# Altium PCB digital_power.PcbDoc (part 2 of 2)
Units mil, origin at the board's own origin, x right, y up, seen from the top; angles counter-clockwise.
Board outline 2700 x 2100 mil, 4 copper layers (L1, L2, L3, L4), stack 13.956 mil thick; 99 components, 71 nets, 287 pads, 79 vias.
Unrouted connection lines stored in the file: 196.
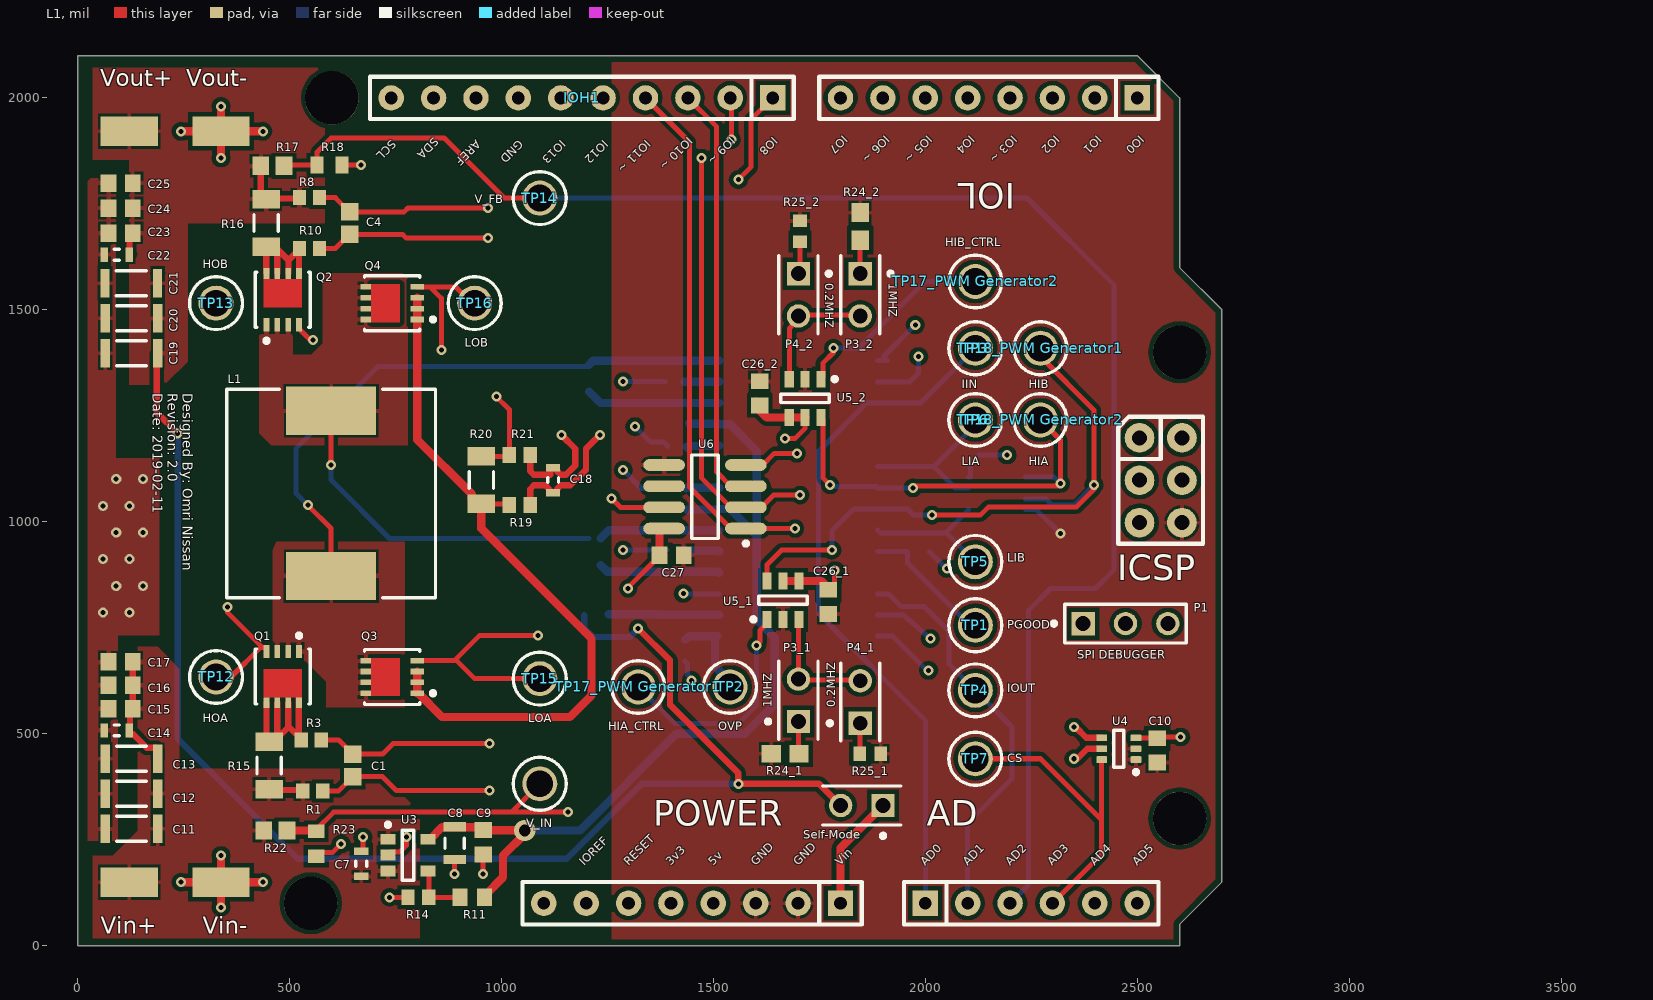
[diagram p0: L1 view]

## Via types
v1: diameter 23.62, hole 11.81, L1 to L4, tented both sides, 78 vias
v2: diameter 50, hole 28, L1 to L4, tented both sides, 1 vias

## Nets (pads, with @x,y where several pads share a name; then routed paths per layer and width w, separated by ;. In a path a pad name is that pad's centre, name@x,y a point inside that pad or via, vN(x,y) a via of type N, cw(c..) or ccw(c..) an arc to the next point about the centre after c; other vN are vias at no path point) (continued)
NetAD_4: (continued)
  L1 w11.81: TP7.1 2271.65,440.94 2416.34,296.26 ; AD.4 2416.34,216.34 2416.34,296.26 ; U4.6 2416.34,296.26
NetAD_5: AD.5 R22.1 R23.2 V_IN.1 | length 2109.8
  L1 w11.81: R23.2@564.96,271.65 564.96,275.59 604.33,314.96 1023.62,314.96 ; V_IN.1 1023.62,314.96 ; v1(1157.48,314.96) 1023.62,314.96
  L1 w19.68: R22.1 R23.2@564.96,271.65
  L2 w11.81: v1(1157.48,314.96) 1618.11,314.96 1744.09,188.98 2311.02,188.98 AD.5
NetAD_6: AD.6
NetC2_1: C2.1 U1.26 | length 318.3
  L4 w19.68: C2.1 1233.66,1280.12 U1.26
NetC2_2: C2.2 L1.1 Q1.1 Q1.2 Q1.3 Q3.5 Q3.6 Q3.7 Q3.8 U1.28 | length 1421.1
  L1 w11.81: v1(543.31,1039.37) 598.43,984.25 L1.1
  L4 w11.81: v1(543.31,1039.37) 515.75,1066.93 515.75,1173.23 709.25,1366.73 1206.69,1366.73 C2.2
  L4 w19.68: C2.2 1216.73,1380.12 U1.28
NetC3_1: C3.1 U1.18 | length 286.8
  L4 w19.68: C3.1@1234.25,897.64 1249.8,882.09 1511.81,882.09 U1.18
NetC3_2: C3.2 L1.2 Q2.1 Q2.2 Q2.3 Q4.5 Q4.6 Q4.7 Q4.8 U1.20 | length 1122.9
  L1 w11.81: v1(598.43,1133.86) 598.43,1246.06 606.3,1253.94 L1.2
  L4 w11.81: v1(598.43,1133.86) 598.43,1098.43 736.22,960.63 C3.2
  L4 w19.68: C3.2@1234.25,960.63 1253.74,980.12 U1.20
NetICSP_1: ICSP.1
NetICSP_3: ICSP.3
NetICSP_4: ICSP.4
NetIOH1_3: IOH1.3 U6.3 | length 993.4
  L1 w11.81: IOH1.3 1507.87,1932.13 1507.87,1117.52 1541.34,1084.05 U6.3
NetIOH1_8: IOH1.8
NetIOH1_9: IOH1.9
NetIOH1_10: IOH1.10
NetIOL_1: IOL.1
NetIOL_2: IOL.2
NetIOL_3: IOL.3
NetIOL_4: IOL.4
NetIOL_5: IOL.5
NetIOL_6: IOL.6
NetIOL_7: IOL.7
NetIOL_8: IOL.8
NetP3_1_1: P3_1.1 R24_1.2 | length 79.2
  L1 w11.81: P3_1.1 1700.79,460.63 R24_1.2@1708.66,452.76
NetP3_1_2: P3_1.2 P4_1.2 U5_1.3 | length 288.7
  L1 w11.81: U5_1.3 1701.28,769.19 1701.28,629.23 P3_1.2 1702.76,626.77 1844.49,626.77 P4_1.2
NetP3_2_1: P3_2.1 R24_2.2 | length 80.6
  L1 w11.81: R24_2.2@1842.52,1664.37 1846.46,1660.43 P3_2.1
NetP3_2_2: P3_2.2 P4_2.2 U5_2.3 | length 309
  L1 w11.81: U5_2.3 1679.13,1456 1700.79,1477.65 1700.79,1489.37 1702.76,1487.4 1844.49,1487.4 P3_2.2
NetP4_1_1: P4_1.1 R25_1.2 | length 78
  L1 w11.81: R25_1.2 1845.47,523.82 P4_1.1 P4_1.1@1850.39,520.87
NetP4_2_1: P4_2.1 R25_2.2 | length 76.6
  L1 w11.81: P4_2.1 1704.72,1589.37 R25_2.2
NetPOWER_1: POWER.1 Self-Mode.1 | length 272.3
  L1 w19.68: POWER.1 1800,230.32 Self-Mode.1
NetPOWER_6: POWER.6
NetPOWER_7: POWER.7
NetQ1_4: Q1.4 R2.2 TP12.1 | length 1612.2
  L1 w11.81: TP12.1 362.2,633.86 432.15,703.8 Q1.4@445.08,703.8 ; v1(354.33,799.21) 354.33,785.5 436.02,703.8
  L2 w11.81: v1(354.33,799.21) 354.33,940.94 397.64,984.25 747.75,984.25 1062.71,1299.21 1251.97,1299.21 v1@1283.46,1330.71
  L4 w11.81: v1@1283.46,1330.71 R2.2
  other v1: 1287.4,1330.71
NetQ2_4: Q2.4 R9.2 TP13.1 | length 2466.1
  L1 w11.81: Q2.4 522.64,1455.51 546.76,1431.39 552.86,1431.39 v1(555.12,1429.13)
  L2 w11.81: TP13.1 326.77,1429.13 ; v1(555.12,1429.13) 326.77,1429.13 ; v1(1287.4,933.07) 1287.4,1027.83 1421.26,1161.69 1421.26,1366.42 1161.7,1625.98 1161.22,1625.51 587.09,1625.51 586.61,1625.98 311.02,1625.98 240.16,1555.12 240.16,1480.31 291.34,1429.13 326.77,1429.13
  L4 w11.81: v1(1287.4,933.07) R9.2
  L4 w27.56: TP13.1@322.83,1511.81 TP13.1
NetQ3_1: Q3.1 Q3.2 Q3.3 Q4.1 Q4.2 Q4.3 R19.2 R20.2 | length 1708.3
  L1 w11.81: R20.2@963.58,1042.32 1015.75,1042.32 R19.2
  L1 w19.68: Q3.3 Q3.2 Q3.1 803.94,595.47 860.04,539.37 1161.42,539.37 1212.6,590.55 1212.6,724.41 952.76,984.25 R20.2 ; Q4.3 Q4.2 801.18,1480.51 800.98,1480.32 799.21,1480.32 801.18,1478.35 Q4.1 801.18,1193.9 930.12,1064.96 930.12,1054.13 941.93,1042.32 R20.2 ; R20.2@975.39,1030.51 963.58,1042.32 R20.2
NetQ3_4: Q3.4 R5.2 TP15.1 | length 1396.1
  L1 w11.81: Q3.4 888.78,672.24 ; v1(1086.61,732.28) 948.82,732.28 888.78,672.24 ; TP15.1 937.01,629.92 894.69,672.24 888.78,672.24
  L2 w11.81: v1(1086.61,732.28) 1086.61,1228.35 1137.8,1279.53 1261.08,1279.53 v1@1314.96,1225.65
  L4 w11.81: v1@1314.96,1225.65 1352.62,1187.99 1383.86,1187.99 1391.73,1180.12 R5.2
  other v1: 1314.96,1224.41
NetQ4_4: Q4.4 R6.2 TP16.1 | length 1339.5
  L1 w11.81: v1(858.27,1405.51) 858.27,1527.56 832.48,1553.35 801.97,1553.35 Q4.4 832.48,1554.13 891.88,1554.13 930.26,1515.75 TP16.1
  L2 w11.81: v1(858.27,1405.51) 1354.33,1405.51 1401.57,1358.27 1401.57,1185.04 1338.58,1122.05 v1(1287.4,1122.05)
  L4 w11.81: v1(1287.4,1122.05) 1330.71,1078.74 R6.2
NetR2_1: R2.1 U1.27 | length 81.9
  L4 w19.68: R2.1 1432.38,1330.41 1513.48,1330.41 U1.27
NetR5_1: R5.1 U1.24 | length 84.4
  L4 w19.68: R5.1 1440.94,1173.23 1440.94,1178.64 1512.3,1178.64 U1.24
NetR6_1: R6.1 U1.22 | length 78.3
  L4 w19.68: R6.1 1437.4,1080.12 U1.22
NetR9_1: R9.1 U1.19 | length 79
  L4 w19.68: R9.1 1437.5,931.59 1512.3,931.59 U1.19
NetR11_1: R11.1 R14.1 U3.4 | length 136.6
  L1 w11.81: U3.4 828.74,174.15 R14.1 R11.1
"NetTP17_PWM Generator1_1": "TP17_PWM Generator1.1" U5_1.1 U6.7 | length 1391.2
  L1 w11.81: v1(1259.84,1055.12) 1280.91,1034.05 U6.7 ; v1(1602.36,708.66) 1609.67,715.97 1609.67,743.53 1626.97,760.83 U5_1.1
  L2 w11.81: v1(1259.84,1055.12) 1201.24,996.52 1201.24,810.57 1303.15,708.66 v1(1602.36,708.66)
  L4 w11.81: 1322.83,610.24 1409.45,523.62 1559.06,523.62 1602.36,566.93 v1(1602.36,708.66)
"NetTP17_PWM Generator2_1": "TP17_PWM Generator2.1" U5_2.1 U6.4 | length 900.3
  L1 w11.81: U6.4 1616.47,1134.05 1643.83,1161.42 v1(1696.85,1161.42) ; U5_2.1 1758.37,1341.04 1758.37,1374.14 1783.46,1399.24 v1(1783.46,1409.45)
  L2 w11.81: v1(1696.85,1161.42) 1783.46,1248.03 v1(1783.46,1409.45)
  L4 w11.81: v1(1783.46,1409.45) 1842.52,1409.45 2000,1566.93 2118.11,1566.93
OVP: IOH1.1 R13.1 TP2.1 U1.15 | length 1823
  L1 w11.81: v1(1559.06,1807.09) 1588.61,1836.64 1588.61,1948.61 IOH1.1
  L2 w11.81: TP2.1 1602.36,610.24 1665.35,673.23 1665.35,751.97 1503.94,913.39 1503.94,1751.97 v1(1559.06,1807.09)
  L4 w11.81: U1.15@1503.94,724.21 1509.84,730.12 U1.15 ; TP2.1 TP2.1@1539.37,622.89
  L4 w19.68: R13.1 1435.04,722.44 1442.72,730.12 U1.15@1509.84,730.12 ; U1.15@1503.94,724.21 1503.94,658.32 TP2.1@1539.37,622.89
OVS: R4.1 R7.2 U1.16 | length 261.4
  L4 w19.68: R4.1@1252.95,781.5 R7.2 1370.77,780.81 1513.09,780.81 U1.16
PGOOD: IOH1.2 R12.1 TP1.1 U1.10 | length 1995.2
  L1 w11.81: IOH1.2 1543.31,1996.69 v1(1543.31,1901.57)
  L2 w11.81: v1(1543.31,1901.57) 1543.31,1885.83 1602.36,1826.77 1602.36,940.94 1775.12,768.19 2105.83,768.19 TP1.1
  L4 w11.81: U1.10 1888.29,929.63 1958.17,929.63 R12.1 1958.66,902.7 2105.46,755.91 TP1.1
RESET: ICSP.5
SA_N: Q1.5 Q1.6 Q1.7 Q1.8 R3.1 R15.2 | length 462.4
  L1 w15: Q1.5 445.87,487.27 468.63,487.27 474.14,492.77 497.05,515.68 ; R15.2@471.46,495.45 Q1.6 ; Q1.7 497.05,515.68 ; 507.87,622.05 521.83,608.09 521.83,572.9 R3.1@521.83,492.93 ; R3.1 527.56,487.2 R3.1@521.83,492.93 ; 497.05,515.68 499.08,515.68 R3.1@521.83,492.93
SA_N: C1.2 R1.2 U1.1 | length 3553.3
  L1 w11.81: R1.2 616.14,365.16 C1.2 719.49,398.62 751.97,366.14 v1(972.44,366.14)
  L3 w11.81: v1@972.5,366.14 917.32,421.32 917.32,503.94 976.38,562.99 976.38,1181.1 799.8,1357.68 799.8,1748.9 920.98,1870.08 1193.19,1870.08 1708.94,1354.33 1866.14,1354.33 v1(1976.38,1464.57)
  L4 w11.81: U1.1 1911.38,1380.12 1901.65,1389.84 v1(1976.38,1464.57)
SA_P: C7.1 C11.2 C12.2 C13.2 C14.1 C15.2 C16.2 C17.2 R1.1 R15.1 R22.2 U3.1 U3.3 Vin+.1 | length 391
  L1 w15: Vin+.1@125.98,149.61 Vin+.1@158.46,149.61 ; C17.2 C16.2 C15.2 123.8,552.54 123.8,509.23 C14.1 122.44,500 123.8,498.64 131.67,498.64 163.41,466.91 186.04,466.91 189.37,463.58 C13.2 ; R15.1 453.8,367.13 529.53,367.13 R1.1
SA_P: C1.1 R3.2 U1.2 | length 3363.1
  L1 w11.81: R3.2 616.14,485.24 C1.1 719.49,451.77 744.09,476.38 v1(972.44,476.38)
  L3 w11.81: v1(972.44,476.38) 1000,503.94 1000,1192.91 819.49,1373.43 819.49,1740.75 929.13,1850.39 1185.04,1850.39 1700.79,1334.65 1923.52,1334.65 1978.64,1389.76 v1(1984.25,1389.76)
  L4 w11.81: U1.2 1963.98,1330.12 1984.25,1350.39 v1(1984.25,1389.76)
SB_N: C4.1 R10.2 U1.14 | length 2246.2
  L1 w11.81: R10.2 608.27,1644.68 C4.1 766.73,1678.15 775.59,1669.29 v1(968.5,1669.29)
  L3 w11.81: v1(968.5,1669.29) 1003.94,1669.29 1070.87,1602.36 1247.75,1602.36 1570.87,1279.25 1570.87,909.45 1775.59,704.72 1952.76,704.72 v1(2007.87,649.61)
  L4 w11.81: U1.14 1923.43,730.12 1999,654.54 v1(2007.87,649.61)
SB_P: Q2.5 Q2.6 Q2.7 Q2.8 R10.1 R16.1 | length 282.4
  L1 w15: R16.1 444.88,1586.61 Q2.8 ; R16.1@469.86,1644.94 497.85,1616.95 ; Q2.7 R16.1@471.46,1643.35 ; Q2.6@497.85,1586.44 497.85,1616.95 ; Q2.5 522.64,1641.73 497.85,1616.95
SB_P: C4.2 R8.2 U1.13 | length 2238.7
  L1 w11.81: R8.2 608.27,1764.76 C4.2 770.67,1731.3 779.53,1740.16 v1(968.5,1740.16)
  L3 w11.81: v1(968.5,1740.16) 1083.15,1625.51 1252.44,1625.51 1590.55,1287.4 1590.55,921.26 1787.4,724.41 v1(2011.81,724.41)
  L4 w11.81: U1.13 1948.23,780.12 v1(2011.81,724.41)
SCK: IOH1.6 P1.3 U6.2 | length 2462.3
  L1 w11.81: v1(1472.44,1858.27) 1472.44,1102.95 1541.34,1034.05 U6.2 1613.49,1034.05 1642.42,1062.99 v1(1704.72,1062.99)
  L2 w11.81: IOH1.6 1140,1915.12 1196.85,1858.27 v1(1472.44,1858.27) ; v1(1704.72,1062.99) 1720.47,1062.99 1933.07,850.39 2481.89,850.39 P1.3
pads on no net: ICSP.2 POWER.8 U1.4 U1.11 U2.2 U2.6 U6.6

## Polygon pours and split planes (outlines as drawn)
GND on L1 "GND_L01_P054" (solid, pour order 54): 1259.84,1.73 2595.24,1.73 2595.24,52.91 2697.6,155.28 2697.6,1501.73 2595.24,1604.09 2599.17,1608.03 2599.17,2001.73 2496.81,2104.09 1259.84,2104.09
+supply on L1 "+SUPPLY_L01_P040" (solid, pour order 40): 35.43,2070.87 35.43,1854.33 122.05,1854.33 122.05,1322.83 204.72,1322.83 259.84,1377.95 259.84,1704.72 582.68,1704.72 582.68,2070.87
GND on L1 "GND_L01_P068" (solid, pour order 68): 31.5,1811.02 90.55,1811.02 90.55,1149.61 192.91,1149.61 192.91,732.28 94.49,732.28 94.49,248.03 23.62,248.03 23.62,1803.15
no net on L1 "NONET_L01_P070" (solid, pour order 70): 23.62,1740.16
no net on L1 "NONET_L01_P066" (solid, pour order 66): 35.43,1740.16
SA_P on L1 "SA_P_L01_P028" (solid, pour order 28): 35.43,15.75 35.43,212.6 82.68,212.6 141.73,271.65 141.73,704.72 188.98,704.72 240.16,653.54 240.16,417.32 704.72,417.32 807.09,314.96 807.09,15.75
NetC3_2 on L1 "NETC3_2_L01_P016" (solid, pour order 16): 767.72,1586.61 779.53,1574.8 779.53,1181.1 456.69,1181.1 429.13,1208.66 429.13,1488.19 507.87,1488.19 507.87,1393.7 551.18,1393.7 578.74,1421.26 578.74,1586.61
NetC2_2 on L1 "NETC2_2_L01_P014" (solid, pour order 14): 771.65,952.76 771.65,562.99 586.61,562.99 586.61,622.05 539.37,669.29 460.63,669.29 460.63,933.07 468.5,952.76
no net on Top Paste "NONET_L-01_P-001" (solid): 692.91,1559.06 755.91,1559.06 755.91,1472.44 692.91,1472.44
no net on Top Paste "NONET_L-01_P-001" (solid): 440.94,1507.87 440.94,1570.87 527.56,1570.87 527.56,1507.87
no net on Top Paste "NONET_L-01_P-001" (solid): 440.94,586.61 440.94,649.61 527.56,649.61 527.56,586.61
no net on Top Paste "NONET_L-01_P-001" (solid): 728.35,629.92
no net on Top Paste "NONET_L-01_P-001" (solid): 779.53,775.59
no net on Top Paste "NONET_L-01_P-001" (solid): 692.91,677.17 755.91,677.17 755.91,590.55 692.91,590.55
GND on L4 "GND_L04_P056" (solid, pour order 56): 0,0 2598.43,0 2598.43,51.18 2700.79,153.54 2700.79,1500 2598.43,1602.36 2602.36,1606.3 2602.36,2000 2500,2102.36 0,2102.36
GND on L2 "GND_L02_P058" (solid, pour order 58): 0,0 2598.43,0 2598.43,51.18 2700.79,153.54 2700.79,1500 2598.43,1602.36 2602.36,1606.3 2602.36,2000 2500,2102.36 0,2102.36
+3V3 on L3 "+3V3_L03_P060" (solid, pour order 60): 0,0 2598.43,0 2598.43,51.18 2700.79,153.54 2700.79,1500 2598.43,1602.36 2602.36,1606.3 2602.36,2000 2500,2102.36 0,2102.36

## Keep-outs
L1:
  region: 248.03,1027.56

## Other copper
L1:
  pour cut-out: 3625.98,1448.82
  pour cut-out: 3468.5,1602.36

## Silkscreen, mask and mechanical layers (free items; w line width, h text height)
Top Overlay:
  text "IO7" at 1805,1912.93 h20 r225
  text "IO6 ~" at 1905,1912.93 h20 r225
  text "IO5 ~" at 2005,1912.93 h20 r225
  text "IO4" at 2105,1912.93 h20 r225
  text "IO3 ~" at 2205,1912.93 h20 r225
  text "IO2" at 2305,1912.93 h20 r225
  text "IO1" at 2405,1912.93 h20 r225
  text "IO0" at 2505,1912.93 h20 r225
  text "IO10 ~" at 1440,1910 h20 r225
  text "IO9 ~" at 1540,1910 h20 r225
  text "IO8" at 1640,1910 h20 r225
  text "SDA" at 840,1907.93 h20 r225
  text "SCL" at 740,1902.93 h20 r225
  text "AREF" at 940,1902.93 h20 r225
  text "GND" at 1040,1902.93 h20 r225
  text "IO13" at 1140,1902.93 h20 r225
  text "IO12" at 1240,1902.93 h20 r225
  text "IO11 ~" at 1340,1902.93 h20 r225
  text "0.2MHZ" at 1763.78,1562.99 h19.68 r270
  text "1MHZ" at 1913.39,1562.99 h19.68 r270
  text "Designed By: Omri Nissan / Revision: 2.0 / Date: 2019-02-11" at 177.17,1303.15 h23.62 r270
  text "SPI DEBUGGER" at 2358.27,677.17 h19.68
  text "1MHZ" at 1637.8,562.99 h19.68 r90
  text "0.2MHZ" at 1787.4,562.99 h19.68 r90
  text "IOREF" at 1195,187.07 h20 r45
  text "RESET" at 1300,187.07 h20 r45
  text "3v3" at 1400,187.07 h20 r45
  text "5v" at 1500,187.07 h20 r45
  text "GND" at 1600,187.07 h20 r45
  text "GND" at 1700,187.07 h20 r45
  text "Vin" at 1800,187.07 h20 r45
  text "AD0" at 2000,187.07 h20 r45
  text "AD1" at 2100,187.07 h20 r45
  text "AD2" at 2200,187.07 h20 r45
  text "AD3" at 2300,187.07 h20 r45
  text "AD4" at 2400,187.07 h20 r45
  text "AD5" at 2500,187.07 h20 r45
Mechanical 1:
  circle w5: c600,2000 r62.99
  circle w5: c2600,300 r62.99
  circle w5: c550,100 r62.99
  circle w5: c2600,1400 r62.99
  lines w5: 0,0 0,2100 2500,2100 2600,2000 2600,1600 2700,1500 2700,150 2600,50 2600,0 0,0

## Dimensions
0,0 to 2697.6,155.28 on Multi-Layer
1259.84,1.73 to 1259.84,2104.09 on Multi-Layer